# Altium PCB LEDBLINKING(AstableMultiVbrator).PcbDoc
Units mil, origin at the board's own origin, x right, y up, seen from the top; angles counter-clockwise.
Board outline 1375 x 2100 mil, 2 copper layers (Top Layer, Bottom Layer); 11 components, 8 nets, 24 pads, 2 vias.
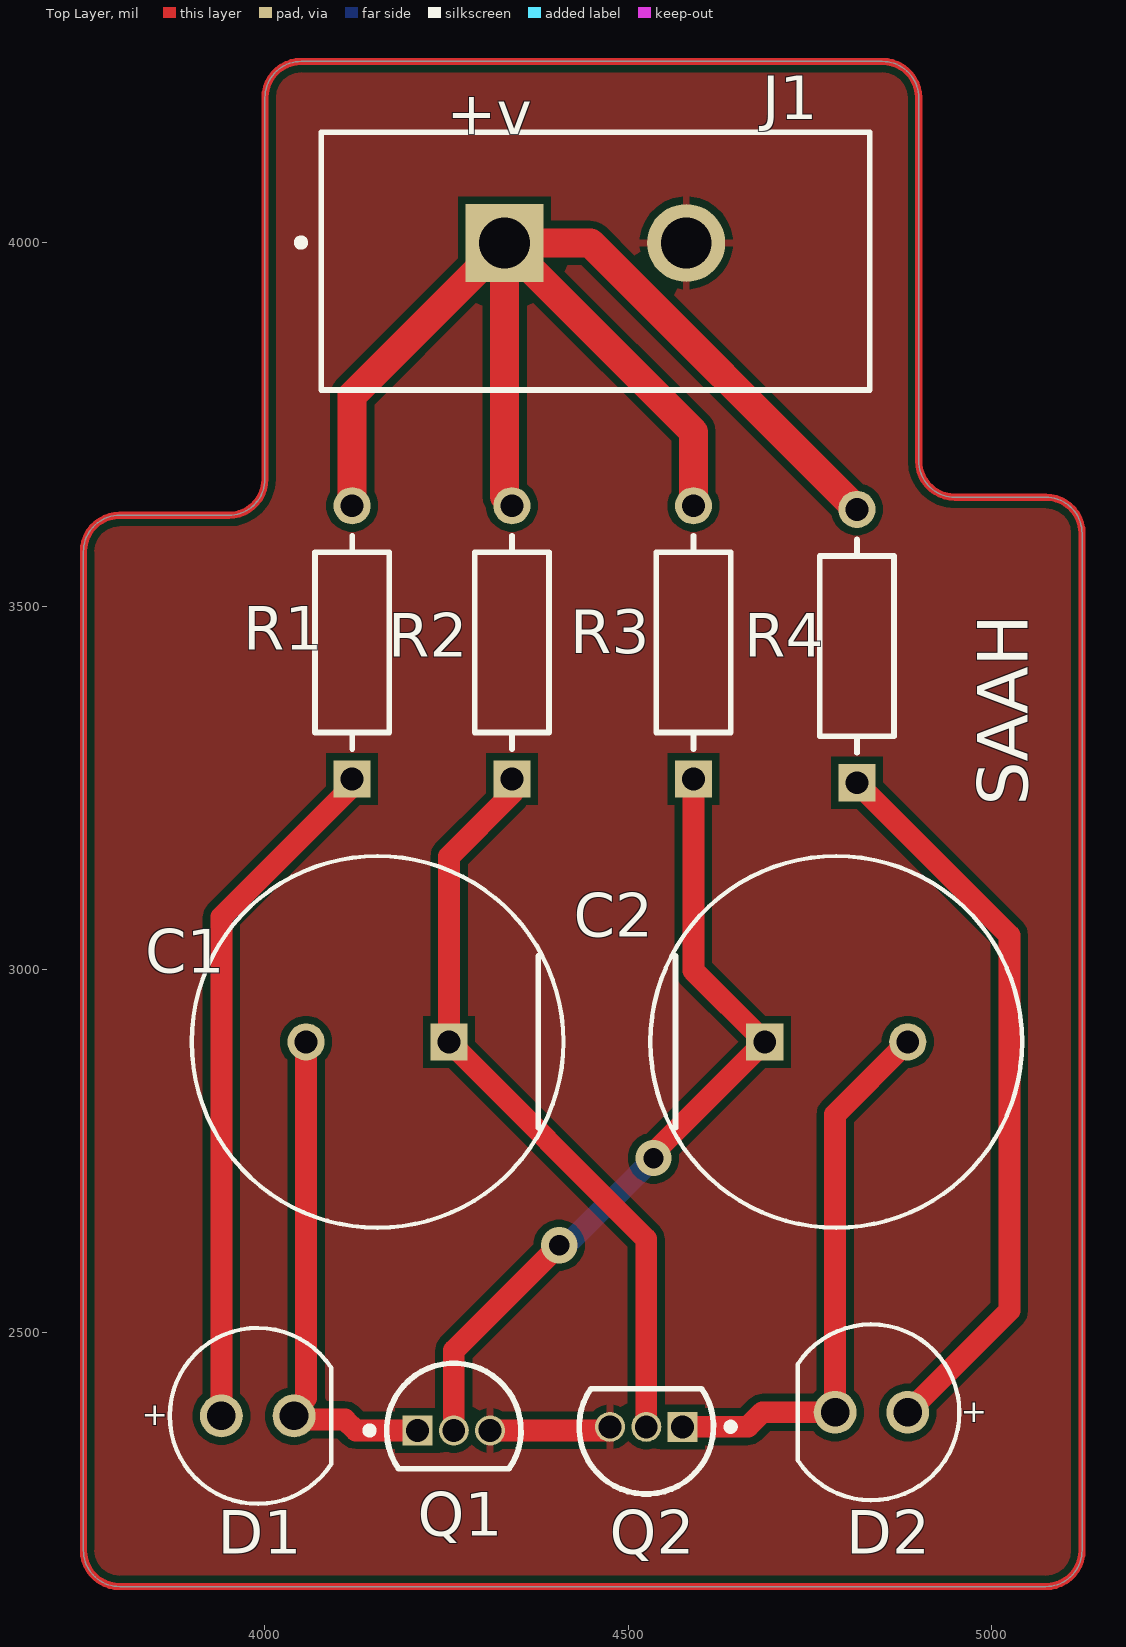
[diagram p0: Top Layer view]
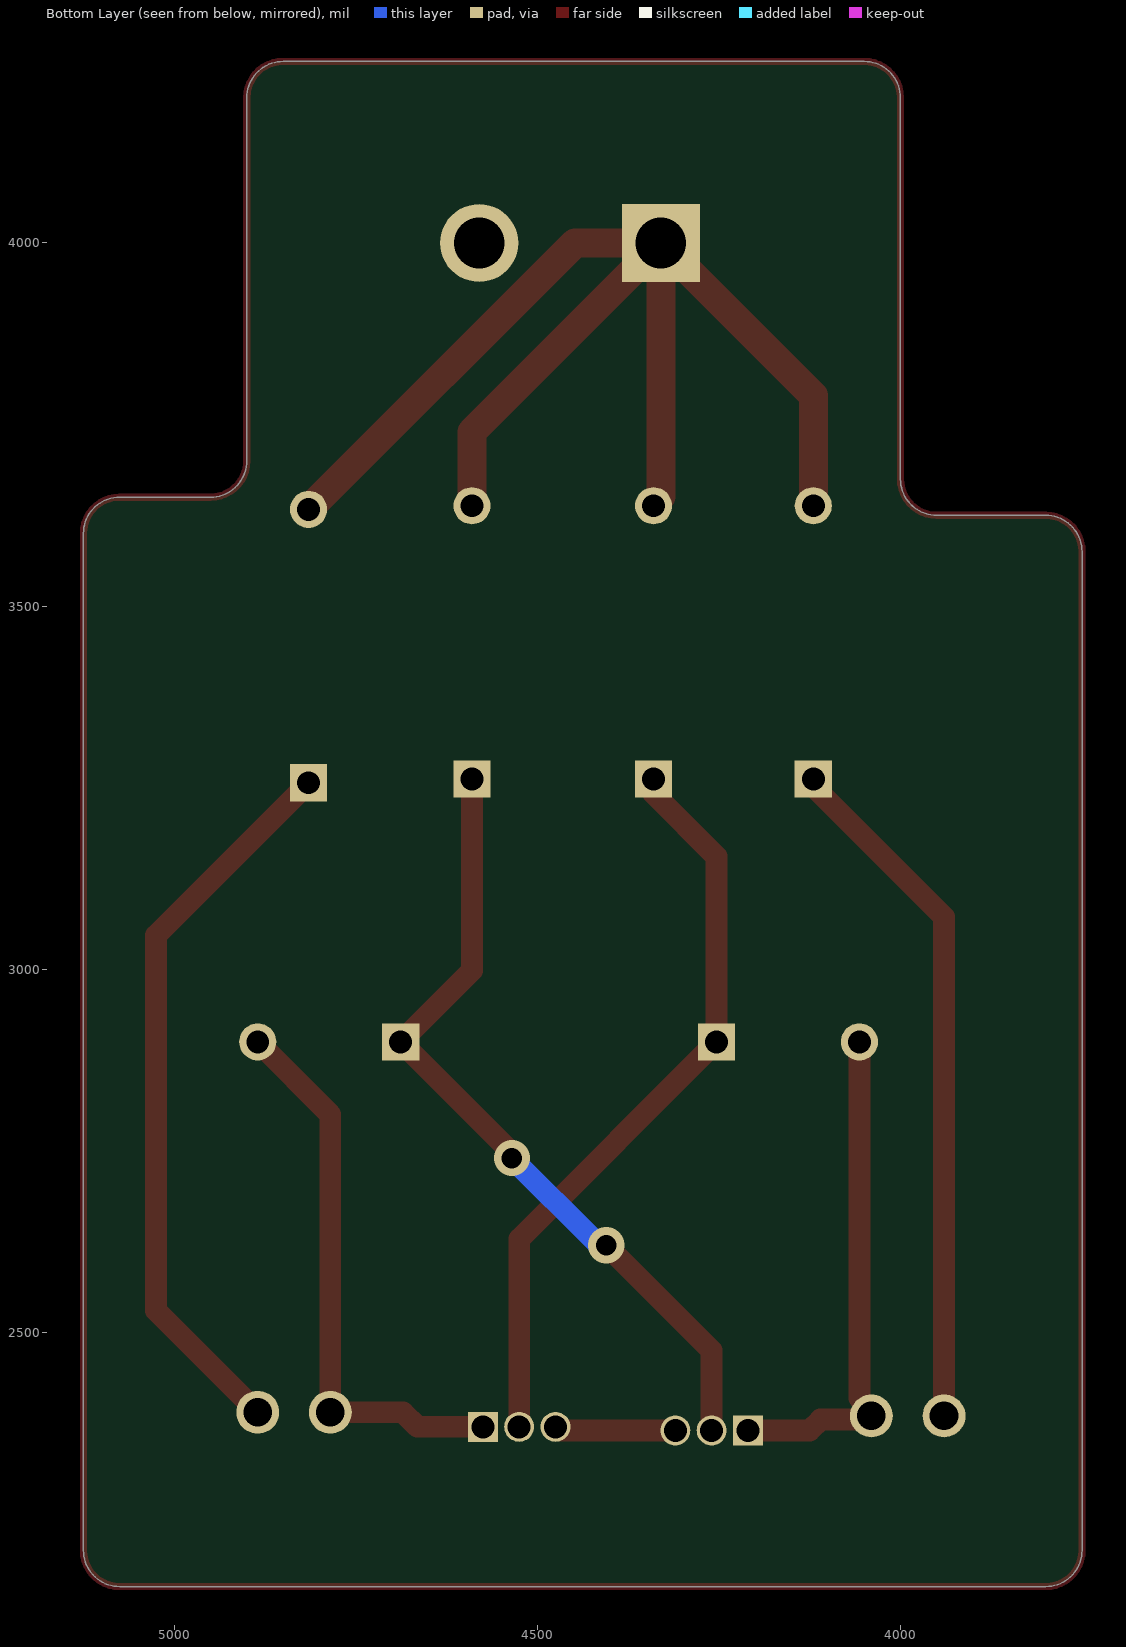
[diagram p1: Bottom Layer view, seen from below]
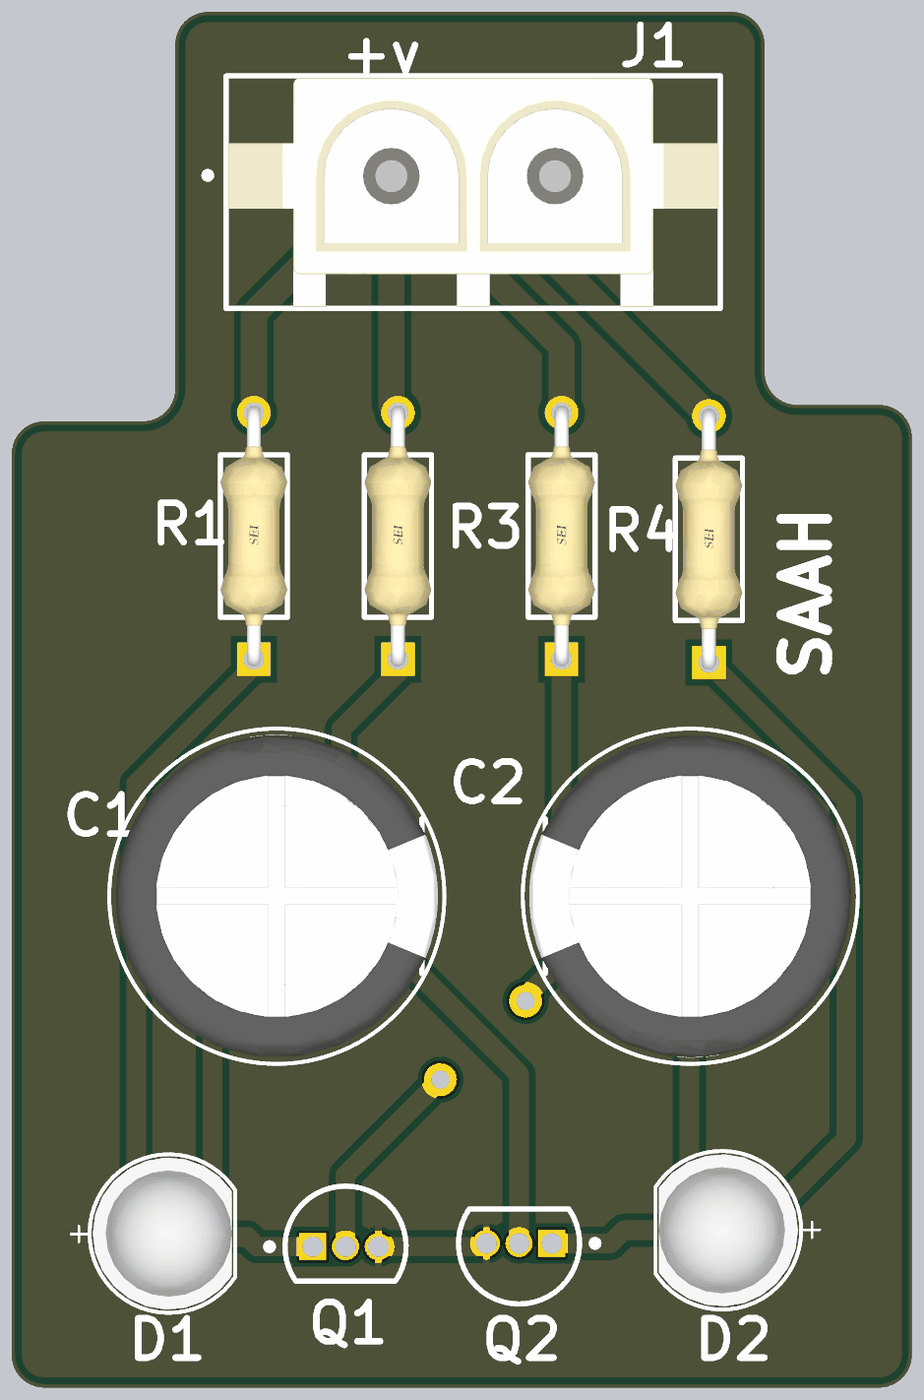
[diagram p2: 3D render of the assembled board from above, using the file's embedded part models]

## Layer stack, top to bottom
Top Solder: solder mask 0.4, Solder Resist, Dk 3.5
Top Layer: signal copper 1.4
Dielectric 1: dielectric 12.6, FR-4, Dk 4.8
Bottom Layer: signal copper 1.4
Bottom Solder: solder mask 0.4, Solder Resist, Dk 3.5

## Board outline
3750,2200 ccw(c3800,2200) 3800,2150 5075,2150 ccw(c5075,2200) 5125,2200 5125,3600 ccw(c5075,3600) 5075,3650 4950,3650 cw(c4950,3700) 4900,3700 4900,4200 ccw(c4850,4200) 4850,4250 4050,4250 ccw(c4050,4200) 4000,4200 4000,3675 cw(c3950,3675) 3950,3625 3800,3625 ccw(c3800,3575) 3750,3575

## Design rules (kind name [scope] priority, off if disabled: settings)
Clearance [All] p1: gap=10 ignorepadtopadclearanceinfootprint=FALSE
PolygonConnect [All] p1: connectstyle=Relief reliefconductorwidth=10 reliefentries=4 polygonreliefangle="90 Angle" airgapwidth=10
RoutingVias [All] p1: holewidth=28 width=50 viastyle="Through Hole" minholewidth=28 minwidth=50 maxholewidth=28 maxwidth=50
SolderMaskExpansion [All] p1: expansion=4 istentingtop=FALSE
SupplyNets "Schematic Supply Nets" [InNet('GND')] p1: voltage=0.000
Width [All] p1: maxlimit=40 minlimit=10 preferedwidth=30 minimp=50.000000 maximp=50.000000 favimp=50.000000
30 further rules are at their usual default settings.

## Components (designator, comment, footprint, x,y, rotation, side; value= is the part's Value field where it differs from the comment)
C1 "10u" FP-RAD-TH-D_12_5_0_5-L_20-MFG 4155,2900 r180 top
C2 "10u" FP-RAD-TH-D_12_5_0_5-L_20-MFG 4786.57,2900 r0 top
D1 "LED" WL-TMRC_D5.9H8.7 3990,2385 r0 top
D2 "LED" WL-TMRC_D5.9H8.7 4835,2390 r180 top
J1 "350428-1" FP-350428-1-MFG 4455,3975 r0 top
Q1 "P2N2222AG" ONSC-TO-92-3-29-11 4260,2365 r0 top
Q2 "P2N2222AG" ONSC-TO-92-3-29-11 4525,2370 r180 top
R1 "470" FP-CF14-MFG 4120,3450 r90 top
R2 "47k" FP-CF14-MFG 4340,3450 r90 top
R3 "47k" FP-CF14-MFG 4590,3450 r90 top
R4 "470" FP-CF14-MFG 4815,3445 r90 top

## Footprints (in the part's own frame and the unit in brackets; to place one, negate y for a bottom-side part, rotate by r counter-clockwise, add the part's x,y. Pads: shape width x height; smd on the part's side, far side on the other; paste and mask are expansions set on the pad)
FP-350428-1-MFG [mm]
  rect 2.73x2.73 hole 1.78 paste-2539.97 mask+0: 1(-3.175,0.635)
  round 2.73 hole 1.78 paste-2539.97 mask+0: 2(3.175,0.635)
  silkscreen extent -10.42,-4.51 9.59,4.51, body extent -9.69,-4.61 9.69,4.61, height 0.25
FP-CF14-MFG [mm]
  rect 1.3x1.3 hole 0.8 paste-2539.97 mask+0: 1(-4.78,0)
  round 1.3 hole 0.8 paste-2539.97 mask+0: 2(4.78,0)
  silkscreen extent -3.73,-1.3 3.73,1.3, body extent -5.53,-1.4 5.53,1.4, height 0.25
FP-RAD-TH-D_12_5_0_5-L_20-MFG [mm]
  rect 1.3x1.3 hole 0.8 paste-2539.97 mask+0: 1(-2.5,0)
  round 1.3 hole 0.8 paste-2539.97 mask+0: 2(2.5,0)
  silkscreen extent -6.5,-6.5 6.5,6.5, body extent -6.6,-6.6 6.6,6.6, height 0.25
ONSC-TO-92-3-29-11 [mm] "TO, 3-Leads, Body Dia 4.7mm, Pitch 1.27mm"
  rect 1.05x1.05 hole 0.8: 1(-1.27,0)
  round 1.05 hole 0.8: 2(0,0) 3(1.27,0)
  silkscreen extent -3.07,-1.34 2.35,2.35, body extent -2.35,-1.33 2.36,2.36, height 7.87
WL-TMRC_D5.9H8.7 [mm] "THT Mono-color Round Color LED, 2-leads"
  round 1.5 hole 1: 1(-1.27,0) 2(1.27,0)
  silkscreen extent -3.07,-3.07 2.58,3.08, body extent -2.95,-2.95 2.45,2.95, height 9.2

## Part data
C1 C2: library part CMP-05427-000380-1, "Aluminum Electrolytic Capacitors (Radial Lead Type) 10uF ±20% 450V", Capacitance=10uF, Case/Package=Radial, Leakage Current=280uA, Max Operating Temperature=105°C, Min Operating Temperature=-25°C, Package Quantity=200, Ripple Current=490mA, Tolerance=20%, Voltage=450V, Construction=RADIAL, Diameter=12.5mm, Dissipation Factor=0.24%, Height=20mm, Height - Seated (Max)=0.787inch, Lead Diameter=0.6mm, Lead Free="Lead Free", Lead Pitch=5mm, Length=20mm, Life (Hours)=10000Hour, Mount="Through Hole", Packaging=Bulk, Radiation Hardening=No, REACH SVHC="No SVHC", RoHS Compliant=Yes, Series=EE, Termination=Radial, Voltage Rating=450V, Voltage Rating (DC)=450V
D1 D2: library part CMP-03913-71241449-1, "151051SS04000 WL-TMRC THT Mono-color Round Color", Forward Current=100mA, Forward Voltage=2.1V, Max Operating Temperature=85°C, Max Reverse Voltage (DC)=5V, Min Operating Temperature=-40°C, Dominant Wavelength=635nm, Height=8.6mm, Length=5mm, Luminous Intensity=250mcd, Mount="Through Hole", NexarPartId=71241449, Packaging=Bulk, Peak Wavelength=640nm, RoHS=Compliant, Viewing Angle=40°, Wavelength=635nm, Width=5mm
J1: library part CMP-03369-000080-1, "CONN HEADER VERT 2POS 6.35MM", Current Rating=12A, Manufacturer="TE Connectivity", Temperature="-40°C to +105°C", Temperature Range High=+105°C, Temperature Range Low=-40°C, Voltage Rating=600V, Automotive=No, Category=Conn, ComponentLink2Description=Datasheet, ComponentLink2URL=https://www.te.com/commerce/DocumentDelivery/DDEController?Action=showdoc&DocId=Customer+Drawing%7F350428%7FY2%7Fpdf%7FEnglish%7FENG_CD_350428_Y2.pdf%7F350428-1, Conn Gender=Male, Conn Orientation=Vertical, Contact Material=Gold,Nickel, Device Class L1=Connectors, Device Class L2="Headers and Wire Housings", Device Class L3=unset, Digikey Description="CONN HEADER VERT 2POS 6.35MM", Height=14.99mm, Lead Free=Yes, Manufacturer Part Number=350428-1, Mouser Description="Connector, Soft Shell; Universal MATE-N-LOK; 2; Nylon; Natural; 19 A; 600 VAC", Number Of Contacts=2, Number Of Rows=1, Octopart=https://octopart.com/350428-1-te+connectivity-46505355, Package=350428-1, Pitch=6.35mm, RoHS=TRUE, Standoff Height=0.63mm
Q1 Q2: library part CMP-1048-01402-1, "Amplifier Transistor, NPN Silicon, 3-Pin TO-92, Pb-Free, Bulk Box", Manufacturer="On Semiconductor", ComponentLink1Description="Manufacturer URL", ComponentLink1URL=http://www.onsemi.com/, ComponentLink2Description=Datasheet, ComponentLink2URL=http://www.onsemi.com/pub_link/Collateral/P2N2222A-D.PDF, ComponentLink3Description="Package Specification", ComponentLink3URL=http://www.onsemi.cn/pub_link/Collateral/2N6426-D.PDF, DatasheetVersion="Rev. 7", fT Min (MHz)=300, IC Continuous (A)=0.6, Mounting Technology="Through Hole", PackageDescription="3-Pin Transistor Outline, Body 4.825 x 3.685 mm, Pitch 1.27 mm", PackageReference=TO-92-3-29-11_AM_SL, PackageVersion="Rev. AM", Packing="Bulk Box", PartNumber=P2N2222AG, Polarity=NPN, RoHS=TRUE
R1 R2 R3 R4: library part CMP-26528-000003-1, "RES 7.5K OHM 1/4W 5% AXIAL", Case/Package=Axial, Max Operating Temperature=155°C, Max Power Dissipation=250mW, Min Operating Temperature=-55°C, Resistance=7.5kR, Resistor Type="Carbon Film", Temperature Coefficient=-400ppm/°C, Tolerance=5%, Contact Plating=Tin, Diameter=2.3mm, Features="Flame Retardant Coating", Lead Free="Lead Free", Length=0.256inch, Mount="Through Hole", Number of Terminations=2, Packaging="Tape and Reel", Power Rating=250mW, Radiation Hardening=No, RoHS Compliant=Yes, Series=CF

## Via types
v1: diameter 50, hole 28, Top Layer to Bottom Layer, 2 vias

## Nets (pads, with @x,y where several pads share a name; then routed paths per layer and width w, separated by ;. In a path a pad name is that pad's centre, name@x,y a point inside that pad or via, vN(x,y) a via of type N, cw(c..) or ccw(c..) an arc to the next point about the centre after c; other vN are vias at no path point)
GND: J1.2 Q1.3 Q2.3 | length 167.1
  Top Layer w30: Q1.3 4466.93,2365 4471.93,2370 Q2.3
NetC1_1: C1.1 Q2.2 R2.1 | length 1020.2
  Top Layer w30: R2.1@4340,3241.81 4253.43,3155.24 C1.1 4525,2628.43 Q2.2
NetC1_2: C1.2 D1.2 Q1.1 | length 700.1
  Top Layer w30: C1.2 4056.57,2409.44 4040.01,2392.87 D1.2 4045.01,2380 4110,2380 4125,2365 Q1.1
NetC2_1: C2.1 Q1.2 R3.1 | length 1110.7
  Top Layer w30: Q1.2 4260,2475 v1(4405,2620) ; v1(4535,2740) 4538.83,2743.83 4538.83,2750.68 C2.1 4590,2998.15 R3.1@4590,3251.81
  Bottom Layer w30: v1(4405,2620) 4408.83,2623.83 4418.83,2623.83 v1(4535,2740)
NetC2_2: C2.2 D2.2 Q2.1 | length 769.7
  Top Layer w30: Q2.1 4665,2370 4684.99,2389.99 D2.2 4784.99,2799.99 C2.2
NetD1_1: D1.1 R1.1 | length 948.4
  Top Layer w30: D1.1 3940.01,3071.82 R1.1@4125,3256.81
NetD2_1: D2.1 R4.1 | length 1011.8
  Top Layer w30: R4.1 5025,3046.81 5025,2530 D2.1
NetJ1_1: J1.1 R1.2 R2.2 R3.2 R4.2 | length 1921.2
  Top Layer w40: R1.2 4120,3790 J1.1 ; R2.2 4340,3641.21 4330,3651.21 J1.1 ; R3.2 4590,3740 J1.1 ; R4.2 4448.19,4000 J1.1
copper on no net: | length 6778.3
  Top Layer w10: 3750,2200 ccw(c3800,2200) 3800,2150 5075,2150 ccw(c5075,2200) 5125,2200 5125,3600 ccw(c5075,3600) 5075,3650 4950,3650 cw(c4950,3700) 4900,3700 4900,4200 ccw(c4850,4200) 4850,4250 4050,4250 ccw(c4050,4200) 4000,4200 4000,4000 4000,3675 cw(c3950,3675) 3950,3625 3800,3625 ccw(c3800,3575) 3750,3575 3750,2200

## Polygon pours and split planes (outlines as drawn)
GND on Top Layer "GND_L01_P000" (solid, pour order 0): 3750,2200 ccw(c3800,2200) 3800,2150 5075,2150 ccw(c5075,2200) 5125,2200 5125,3600 ccw(c5075,3600) 5075,3650 4950,3650 cw(c4950,3700) 4900,3700 4900,4200 ccw(c4850,4200) 4850,4250 4050,4250 ccw(c4050,4200) 4000,4200 4000,3675 cw(c3950,3675) 3950,3625 3800,3625 ccw(c3800,3575) 3750,3575

## Silkscreen, mask and mechanical layers (free items; w line width, h text height)
Top Overlay:
  text "+v" at 4250,4150 h60
  text "SAAH" at 5050,3225 h70 r90
Top Designator:
  text "+v" at 4250,4150 h60

## Text inside footprints (layer, text, board x,y; h text height)
D1: Top Overlay "+" at 3830.55,2372.01 h31.5
D2: Top Overlay "+" at 4994.45,2402.99 h31.5 r180